# EAGLE board EuroKastle_PCB_BOARD (EAGLE 9.0.0)
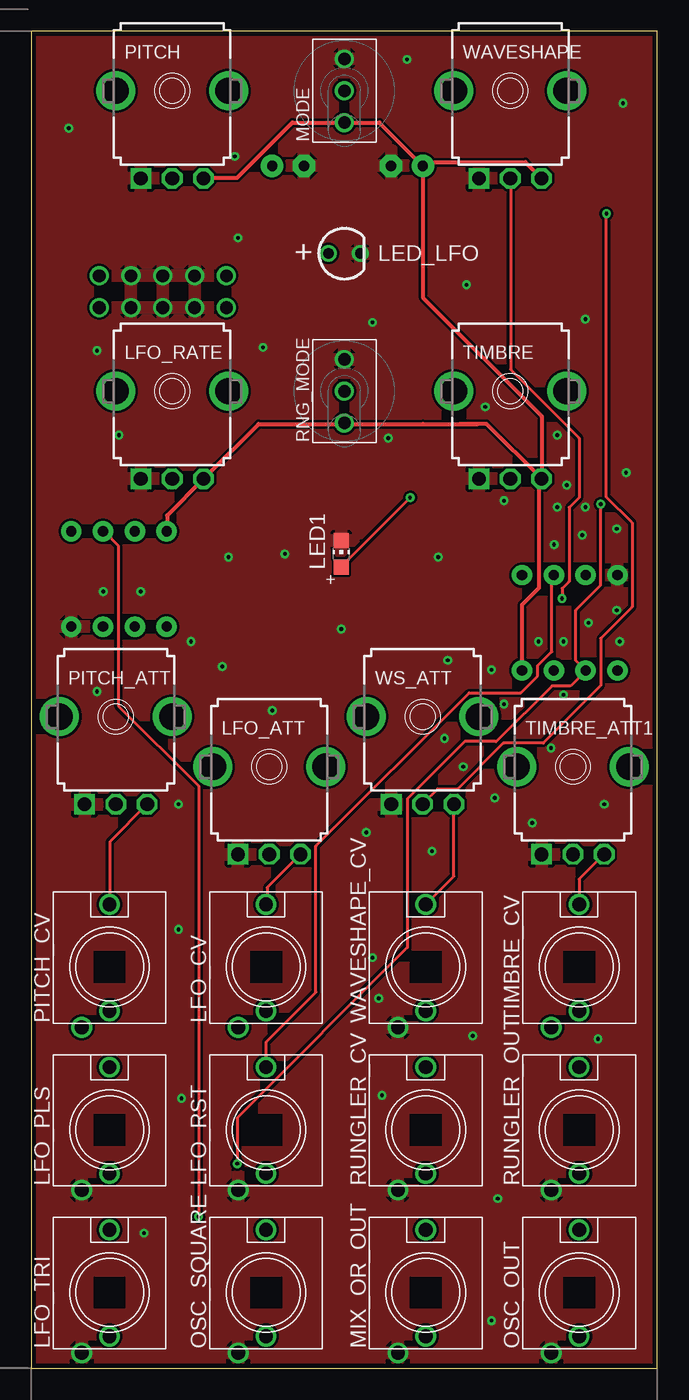
[diagram p0: board, top side]
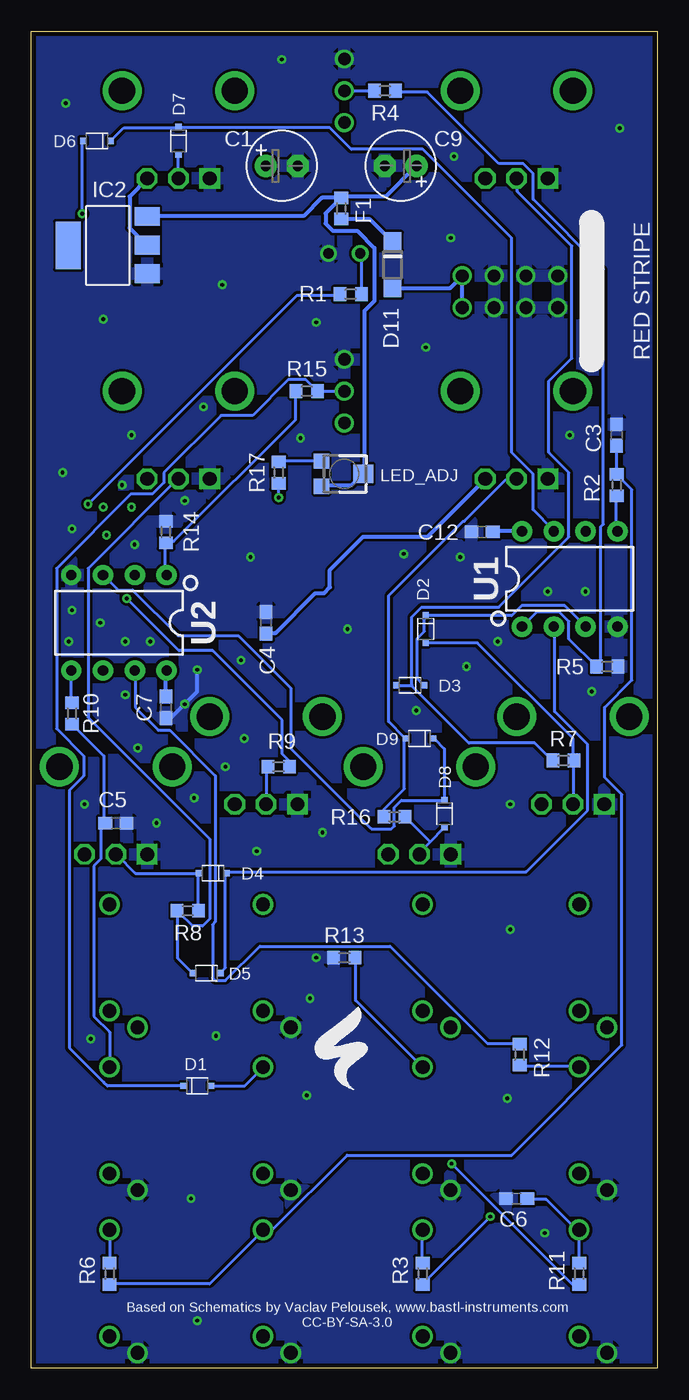
[diagram p1: board, bottom side, seen from below]

Size 50 x 106.8 mm. Coordinates in mm from the lower left corner, seen from the top.
Outline: 0,0 50,0 50,106.8 0,106.8 0,0
Copper layers (1*16): Top 0.035mm / dielectric 1.5mm / Bottom 0.035mm
Design rules "default *": minimum track width 6mil, minimum drill 0.3mm, track to track 8mil, track to pad 8mil, pad to pad 8mil, via to via 8mil, smd to smd 6mil, copper to edge 15mil, drill to drill 6mil, minimum pad ring 10mil, minimum via ring 8mil, stop-mask expansion 4mil, vias tented up to drill 15mil, thermal gap 10mil
Net classes: 0 default: width 0.254 mm; 1 +12V: width 0.33 mm; 2 +5V: width 0.33 mm; 3 GND: width 0.33 mm

## Footprints (pad centres in the part's own frame; a part is rotated, then mirrored left to right if it is on the bottom)
E2,5-6 = drill 0.813 pad 1.778: + -1.27,0 | drill 0.813 pad 1.778 octagon: - 1.27,0
C0603 = smd 1.1 x 1: 1 -0.85,0; 2 0.85,0
SOD323(F) = smd 0.5 x 0.5: 1 1.1,0; 2 -1.1,0
SOD123 = smd 1.4 x 1.4: A 1.9,0; C -1.9,0
R0603 = smd 1 x 1.1: 1 -0.85,0; 2 0.85,0
SOT223 = smd 1.499 x 2.007: 1 -2.261,-3.15; 2 0.025,-3.15; 3 2.311,-3.15 | smd 3.81 x 2.007: 4 0,3.15
CHIP-LED0805 = smd 1.2 x 1.2: A 0,-1.05; C 0,1.05
TC33X = smd 1.2 x 1.2: 1 -1,-1.825; 3 1,-1.825 | smd 1.5 x 1.6: 2 0,1.5
LED3MM = drill 0.813: A -1.27,0; K 1.27,0
9MM_SNAP-IN_POT = drill 1.1 square: 1 -2.5,-7 | drill 1.1 octagon: 2 0,-7; 3 2.5,-7 | drill 2.1 pad 2.794: CHASSIS1 -4.5,0; CHASSIS2 4.5,0
INSTRUO_S_JACK_SMALL2 = drill 1.1: GND -2.223,-4.826; NORM 0,-3.5; TIP 0,5
SUBMINI_TOGGLE = drill 1 pad 1.422: 1 -2.54,0; 3 2.54,0; COM 0,0
EURO_POWER2 = drill 1.016: GND1 -1.27,2.54; GND2 1.27,2.54; GND3 -1.27,0; GND4 1.27,0; GND5 -1.27,-2.54; GND6 1.27,-2.54; V+ -1.27,5.08; V++ 1.27,5.08; V- -1.27,-5.08; V-- 1.27,-5.08
DIP08_MCU = drill 0.813 pad 1.626: 1 -3.81,-3.81; 2 -1.27,-3.81; 3 1.27,-3.81; 4 3.81,-3.81; 5 3.81,3.81; 6 1.27,3.81; 7 -1.27,3.81; 8 -3.81,3.81

## Placement (x,y rotation side)
C1  22u  [E2,5-6]  30,96.05 0 bottom
C3  470n  [C0603]  3.25,74.55 270 bottom
C4  470n  [C0603]  31.25,59.55 90 bottom
C5  470n  [C0603]  43.25,43.55 180 bottom
C6  470n  [C0603]  11.25,13.55 180 bottom
C7  100n  [C0603]  39.25,52.8 270 bottom
C9  22u  [E2,5-6]  20.5,96.05 180 bottom
C12  100n  [C0603]  14,66.8 180 bottom
D1  610-CMDZ5L1  [SOD323(F)]  36.75,22.55 180 bottom
D2  610-CMDZ5L1  [SOD323(F)]  18.5,59.05 90 bottom
D3  610-CMDZ5L1  [SOD323(F)]  19.75,54.55 0 bottom
D4  610-CMDZ5L1  [SOD323(F)]  35.5,39.55 0 bottom
D5  610-CMDZ5L1  [SOD323(F)]  36,31.55 0 bottom
D6  610-CMDZ5L1  [SOD323(F)]  44.75,98.05 0 bottom
D7  610-CMDZ5L1  [SOD323(F)]  38.25,98.05 90 bottom
D8  610-CMDZ5L1  [SOD323(F)]  17,44.3 90 bottom
D9  610-CMDZ5L1  [SOD323(F)]  19,50.3 0 bottom
D11  1N5819HW  [SOD123]  21.15,88.15 270 bottom
F1  100Ohms  [R0603]  25.25,92.65 270 bottom
IC2  LM1117-5.0  [SOT223]  43.9,89.7 90 bottom
LED1  0805 LED  [CHIP-LED0805]  24.75,65.05 0 top
LED_ADJ  10k  [TC33X]  25,71.45 270 bottom
LED_LFO  LED3MM  [LED3MM]  25,89.05 0 top
LFO_ATT  100k(Plastic)  [9MM_SNAP-IN_POT]  19,48.05 0 top
LFO_CV  INSTRUO_S_JACK_SMALL2  [INSTRUO_S_JACK_SMALL2]  18.75,32.05 0 top
LFO_PLS  INSTRUO_S_JACK_SMALL2  [INSTRUO_S_JACK_SMALL2]  6.25,19.05 0 top
LFO_RATE  100k  [9MM_SNAP-IN_POT]  11.25,78.05 0 top
LFO_RST  INSTRUO_S_JACK_SMALL2  [INSTRUO_S_JACK_SMALL2]  18.75,19.05 0 top
LFO_TRI  INSTRUO_S_JACK_SMALL2  [INSTRUO_S_JACK_SMALL2]  6.25,6.05 0 top
MIX_OR_OUT  INSTRUO_S_JACK_SMALL2  [INSTRUO_S_JACK_SMALL2]  31.5,6.05 0 top
MODE  SPDT_ON_OFF_ON_SUBMINI  [SUBMINI_TOGGLE]  25,102.05 90 top
OSC_OUT  INSTRUO_S_JACK_SMALL2  [INSTRUO_S_JACK_SMALL2]  43.75,6.05 0 top
OSC_SQUARE  INSTRUO_S_JACK_SMALL2  [INSTRUO_S_JACK_SMALL2]  18.75,6.05 0 top
PITCH  100k  [9MM_SNAP-IN_POT]  11.25,102.05 0 top
PITCH_ATT  100k(Plastic)  [9MM_SNAP-IN_POT]  6.75,52.05 0 top
PITCH_CV  INSTRUO_S_JACK_SMALL2  [INSTRUO_S_JACK_SMALL2]  6.25,32.05 0 top
POWER  EURO_POWER2  [EURO_POWER2]  10.5,86 90 bottom
R1  1k  [R0603]  24.5,85.8 0 bottom
R2  1k  [R0603]  3.25,70.55 90 bottom
R3  1k  [R0603]  18.75,7.55 90 bottom
R4  100k  [R0603]  21.75,102.05 180 bottom
R5  100k  [R0603]  4,56.05 180 bottom
R6  1k  [R0603]  43.75,7.55 90 bottom
R7  100k  [R0603]  7.5,48.55 180 bottom
R8  100k  [R0603]  37.5,36.55 180 bottom
R9  100k  [R0603]  30.25,48.05 0 bottom
R10  1k  [R0603]  46.75,52.3 270 bottom
R11  1k  [R0603]  6.25,7.55 90 bottom
R12  1k  [R0603]  11,25.05 270 bottom
R13  100k  [R0603]  25,32.8 0 bottom
R14  100k  [R0603]  39.25,66.8 270 bottom
R15  100k  [R0603]  28,78.05 0 bottom
R16  100k  [R0603]  21,44.05 180 bottom
R17  470R  [R0603]  30.25,71.55 270 bottom
RNG_MODE  SPDT_ON_OFF_ON_SUBMINI  [SUBMINI_TOGGLE]  25,78.05 90 top
RUNGLER_CV  INSTRUO_S_JACK_SMALL2  [INSTRUO_S_JACK_SMALL2]  31.5,19.05 0 top
RUNGLER_OUT  INSTRUO_S_JACK_SMALL2  [INSTRUO_S_JACK_SMALL2]  43.75,19.05 0 top
TIMBRE  100k  [9MM_SNAP-IN_POT]  38.25,78.05 0 top
TIMBRE_ATT1  100k(Plastic)  [9MM_SNAP-IN_POT]  43.25,48.05 0 top
TIMBRE_CV  INSTRUO_S_JACK_SMALL2  [INSTRUO_S_JACK_SMALL2]  43.75,32.05 0 top
U1  ATTINY_85_VCO  [DIP08_MCU]  7,63.05 0 bottom
U2  ATTINY_85_LFO  [DIP08_MCU]  43,59.55 180 bottom
WAVESHAPE  100k  [9MM_SNAP-IN_POT]  38.25,102.05 0 top
WAVESHAPE_CV  INSTRUO_S_JACK_SMALL2  [INSTRUO_S_JACK_SMALL2]  31.5,32.05 0 top
WS_ATT  100k(Plastic)  [9MM_SNAP-IN_POT]  31.25,52.05 0 top

## Library data of the parts
C1 C3-C6 C9 F1 LFO_ATT LFO_CV LFO_PLS LFO_RATE LFO_RST LFO_TRI MIX_OR_OUT MODE OSC_OUT OSC_SQUARE PITCH PITCH_ATT PITCH_CV R1-R16 RNG_MODE RUNGLER_CV RUNGLER_OUT TIMBRE TIMBRE_ATT1 TIMBRE_CV WAVESHAPE WAVESHAPE_CV WS_ATT = AA_Stobbert
C7 C12 = rcl
D1-D9 = nxp_60_1_1
D11 = diode
IC2 = og-vreg
LED1 LED_ADJ R17 = adafruit
LED_LFO = zlob
POWER = INSTRUO
U1 U2 = SparkFun-Retired; PROD_ID: IC-09439

## Nets
+5V [+5V]: C1.+ C4.1 C7.1 C12.1 IC2.2 LFO_RATE.3 MODE.1 PITCH.3 RNG_MODE.1 TIMBRE.3 U1.8 U2.8 WAVESHAPE.3
GND [GND]: C1.- C3.1 C4.2 C5.1 C6.2 C7.2 C9.- C12.2 IC2.1 LED1.C LED_LFO.K LFO_ATT.1 LFO_PLS.GND LFO_RATE.1 LFO_RST.GND LFO_TRI.GND MIX_OR_OUT.GND MODE.3 OSC_OUT.GND OSC_SQUARE.GND PITCH.1 PITCH_ATT.1 POWER.GND1 POWER.GND2 POWER.GND3 POWER.GND4 POWER.GND5 POWER.GND6 R5.1 R13.1 R14.1 RNG_MODE.3 RUNGLER_CV.GND RUNGLER_OUT.GND TIMBRE.1 TIMBRE_ATT1.1 U1.4 U2.4 WAVESHAPE.1 WAVESHAPE_CV.GND WS_ATT.1
LFO_MIX: D8.1 D9.1 U2.3
MISO: R3.1 U1.6
MOSI: R2.1 U1.5
N$1: C3.2 MIX_OR_OUT.TIP R2.2 R6.1
N$2: R4.1 R5.2 U1.1
N$3: OSC_SQUARE.TIP R3.2
N$4: MODE.COM R4.2
N$5: OSC_OUT.TIP R6.2
N$6: PITCH_ATT.3 PITCH_CV.TIP
N$7: D2.2 PITCH_ATT.2 R7.1
N$8: TIMBRE_ATT1.3 TIMBRE_CV.TIP
N$9: D3.2 PITCH.2 R7.2
N$10: D4.2 R8.1 TIMBRE_ATT1.2
N$11: D5.2 R8.2 TIMBRE.2
N$12: D6.2 R9.1 WS_ATT.2
N$13: WAVESHAPE_CV.TIP WS_ATT.3
N$14: D7.2 R9.2 WAVESHAPE.2
N$15: R10.1 U2.5
N$16: C5.2 R10.2 RUNGLER_OUT.TIP
N$17: R1.1 R11.1 U2.6
N$18: C6.1 LFO_TRI.TIP R11.2
N$19: LFO_RST.TIP R13.2 U2.2
N$20: R12.1 U2.7
N$21: LFO_PLS.TIP R12.2
N$22: R14.2 R15.1 U2.1
N$23: LFO_ATT.3 LFO_CV.TIP
N$24: D1.2 RUNGLER_CV.TIP
N$25: D8.2 LFO_ATT.2 R16.1
N$26: D9.2 LFO_RATE.2 R16.2
N$27: D1.1 R15.2 RNG_MODE.COM
N$28: LED_LFO.A R1.2
N$29: LED1.A R17.2
N$30: LED_ADJ.1 R17.1
N$34 [+12V]: D11.C F1.2
PITCH: D2.1 D3.1 U1.3
PWR+ [+12V]: D11.A POWER.V+ POWER.V++
TMBR: D4.1 D5.1 U1.2
VCC [+12V]: C9.+ F1.1 IC2.3 LED_ADJ.2 LED_ADJ.3
WS: D6.1 D7.1 U1.7

## Tracks (layer width: path | path; a pad name or v marks a point on that pad's centre or on a via)
+5V
  Top 0.33: C1.+ 31.18,96.12 27.79,99.51 MODE.1 20.86,99.51 16.44,95.09 13.81,95.09 PITCH.3 | C1.+ 31.41,96.12 31.64,96.35 39.45,96.35 WAVESHAPE.3 | U1.8 10.84,66.97 10.84,68.12 13.7,70.97 LFO_RATE.3 13.81,71.09 18.15,75.43 24.9,75.43 RNG_MODE.1 25.12,75.43 31.3,75.43 34.25,75.43 | 34.25,75.43 35.64,75.43 | TIMBRE.3 40.55,71.09 40.75,71.28 40.75,76.05 31.27,85.53 C1.+ | 31.3,95.89 C1.+ | TIMBRE.3 36.37,75.43 34.25,75.43 | U2.8 39.19,60.99 40.55,62.35 40.55,70.85 TIMBRE.3
  Bottom 0.33: WAVESHAPE.3 40.78,94.98 42.16,93.61 42.16,91.09 40.79,89.72 IC2.2 | C7.1 39.3,53.72 39.3,55.66 U2.8 | C12.1 13.12,66.86 10.84,66.86 U1.8 | C4.1 31.18,58.74 30.5,58.74 27.32,61.92 26.62,61.92 26.15,62.39 26.15,63.77 23.52,66.4 18.38,66.4 13.81,70.97 LFO_RATE.3
GND  (via drill 0.3)
  Bottom 0.33: 36.75,54.45 36.75,54.8 | 36.75,54.8 v36.75,55.8 | C7.2 38.85,51.95 v37.75,53.05 36.75,54.05 36.75,54.8
  other vias: 15.25,56.05 12.75,58.05 8.75,62.05 5.75,62.05 5.25,54.05 19.25,52.55 46.75,60.55 42.5,58.05 46.75,67.05 44.25,68.8 44,66.55 42,68.8 41.75,65.8 37.75,69.3 44.25,83.8 34.75,86.55 27.25,83.55 18.5,81.55 28.5,74.3 36.25,76.8 42,74.55 7,74.55 20.25,65.05 16.25,96.8 42.75,70.55 26.75,42.8 27.75,29.55 11.75,35.05 12,21.55 28,21.8 35.25,26.55 45.25,26.3 37,45.55 27.25,32.8 9,10.8 33,50.3 34.5,48.05 40.5,58.05 47,58.05 44.5,59.55 41.5,49.55 42.5,53.8 15.75,64.8 11.75,45.05 33.25,56.55 24.75,59.05 32.5,64.8 5.25,81.3 16.5,90.3 3,99.05 30,104.55 47.25,101.05 47.5,71.55 36.75,3.8 37.25,13.55 32,41.3 40,43.55 45.75,45.05
  pour Top: -0.75,108.05 -0.75,-0.95 51.25,-0.95 51.25,108.05
  pour Bottom: -1.75,109.05 -1.75,-1.95 52.25,-1.95 52.25,109.05
LFO_MIX
  Bottom 0.254: D9.1 17.81,50.29 17.01,49.49 17.01,45.48 D8.1 17.12,45.37 20.44,45.37 21.01,44.8 21.01,43.31 21.24,43.08 22.84,43.08 29.28,49.52 29.28,54.33 33.47,58.52 38.28,58.52 41.93,62.17 43.07,62.17 44.21,63.32 U2.3
MISO  (via drill 0.3)
  Top 0.254: v13.35,12.11 13.35,46.51 6.95,52.92 6.95,65.72 5.81,66.86 U1.6
  Bottom 0.254: v13.35,12.11 18.72,6.74 R3.1
MOSI
  Bottom 0.254: R2.1 3.29,69.6 3.29,66.97 U1.5
N$1
  Bottom 0.254: C3.2 3.29,73.6 3.29,71.43 R2.2 3.18,71.32 2.04,70.17 2.04,54.97 4.21,52.8 4.21,47.2 2.84,45.83 2.84,25.83 11.64,17.03 24.78,17.03 30.73,11.08 31.41,11.08 MIX_OR_OUT.TIP 31.52,10.97 35.76,6.74 43.64,6.74 R6.1
N$2
  Bottom 0.254: 4.89,56.11 R5.2 | U1.1 10.72,59.32 9.58,60.46 7.87,60.46 7.07,59.66 7.07,58.27 R5.2 | R4.1 20.89,101.95 18.38,101.95 12.67,96.23 10.72,96.23 9.92,95.44 9.92,93.38 4.32,87.78 4.32,67.43 4.55,67.2 4.55,56.35 R5.2
N$3
  Bottom 0.254: R3.2 18.84,8.45 18.84,10.97 OSC_SQUARE.TIP
N$4
  Bottom 0.254: R4.2 22.61,102.06 24.9,102.06 MODE.COM
N$5
  Bottom 0.254: R6.2 43.76,8.45 43.76,10.97 OSC_OUT.TIP
N$6
  Top 0.254: PITCH_CV.TIP 6.26,37.14 6.26,42.06 9.24,45.03 PITCH_ATT.3
N$7
  Bottom 0.254: D2.2 14.38,57.94 6.72,50.29 6.72,48.57 R7.1 6.72,48.46 6.72,45.14 PITCH_ATT.2
N$8
  Top 0.254: TIMBRE_CV.TIP 43.76,37.14 43.76,39.08 45.7,41.03 TIMBRE_ATT1.3
N$9
  Bottom 0.254: 19.64,54.52 20.78,54.52 D3.2 | 19.64,54.52 15.07,49.94 9.81,49.94 8.44,48.57 R7.2 | PITCH.2 11.18,94.98 11.18,93.99 6.84,89.64 6.84,80.69 8.66,78.86 8.66,73.15 7.07,71.55 7.07,66.4 12.67,60.8 18.84,60.8 19.64,60 19.64,54.63 19.64,54.52
N$10
  Bottom 0.254: R8.1 36.67,36.57 36.67,39.54 D4.2 36.78,39.54 41.7,39.54 43.18,41.03 TIMBRE_ATT1.2
N$11
  Bottom 0.254: 37.13,31.65 D5.2 38.29,32.74 38.29,36.48 | 38.29,36.48 38.27,36.46 37.13,35.31 36.33,35.31 35.76,35.88 35.76,42.28 45.47,52 45.47,63.89 38.27,71.09 TIMBRE.2 | 38.29,36.48 R8.2
N$12  (via drill 0.3)
  Top 0.254: v45.93,92.23 45.93,69.6 47.98,67.55 47.98,60.82 45.47,58.3 45.47,54.52 40.89,49.94 37.7,49.94 34.04,46.29 32.44,46.29 31.3,45.14 WS_ATT.2
  Bottom 0.254: v45.93,92.23 45.93,97.95 D6.2 | R9.1 31.18,48 31.18,45.14 WS_ATT.2
N$13
  Top 0.254: WAVESHAPE_CV.TIP 33.75,39.3 WS_ATT.3
N$14  (via drill 0.3)
  Top 0.254: v42.38,61.49 42.38,62.29 42.95,62.86 42.95,68.75 43.75,69.55 43.75,74.3 38.27,79.77 38.27,94.98 WAVESHAPE.2
  Bottom 0.254: D7.2 38.27,96.92 38.27,95.09 WAVESHAPE.2 | v42.38,61.49 38.22,57.33 35.53,57.33 29.97,51.77 29.97,49.08 29.47,48.57 29.47,48.11 R9.2
N$15
  Bottom 0.254: R10.1 46.84,53.26 46.84,55.66 U2.5
N$16
  Bottom 0.254: R10.2 46.73,51.43 44.21,48.91 44.21,43.66 C5.2 44.1,43.43 44.44,43.08 44.44,40.69 45.01,40.11 45.01,28.11 43.76,26.86 43.76,24.11 RUNGLER_OUT.TIP
N$17  (via drill 0.3)
  Top 0.254: v16.44,16.34 16.44,20 30.04,33.6 30.04,45.48 34.61,50.06 37.13,50.06 41.58,54.52 43.07,54.52 44.21,55.66 U2.6 43.48,56.53 43.48,60.56 45.47,62.55 v45.47,69.03
  Bottom 0.254: v16.44,16.34 6.84,6.74 6.26,6.74 R11.1 | v45.47,69.03 28.78,85.72 25.35,85.72 R1.1
N$18
  Bottom 0.254: R11.2 6.26,8.45 6.26,10.97 LFO_TRI.TIP 6.38,10.97 8.89,13.48 10.38,13.48 C6.1
N$19
  Top 0.254: U2.2 41.7,63.32 41.56,63.18 41.56,57.24 40.44,56.11 40.44,55.31 39.07,53.94 34.95,53.94 22.72,41.71 22.72,30.02 18.75,26.05 LFO_RST.TIP
  Bottom 0.254: R13.2 24.1,32.8 24.1,29.37 18.84,24.11 LFO_RST.TIP
N$20
  Bottom 0.254: R12.1 11.07,25.94 13.58,25.94 21.35,33.71 31.75,33.71 34.5,30.97 35.3,30.97 35.53,31.2 35.53,35.43 35.3,35.66 35.3,47.31 38.95,50.97 39.87,50.97 41.7,52.8 41.7,55.66 U2.7
N$21
  Bottom 0.254: R12.2 10.95,24.11 6.26,24.11 LFO_PLS.TIP
N$22
  Bottom 0.254: U2.1 39.3,63.43 39.3,65.94 R14.2 39.18,66.06 38.61,66.06 28.9,75.77 28.9,77.95 R15.1
N$23
  Top 0.254: LFO_CV.TIP 18.84,37.14 18.84,38.4 21.47,41.03 LFO_ATT.3
N$24
  Bottom 0.254: RUNGLER_CV.TIP 31.52,24 32.97,22.55 D1.2
N$25
  Bottom 0.254: 18.15,42.06 19.07,41.14 LFO_ATT.2 | 18.15,42.06 D8.2 | 18.15,42.06 20.09,44 R16.1
N$26
  Bottom 0.254: R16.2 21.81,44.11 21.81,44.69 20.21,46.29 20.21,50.29 D9.2 20.21,50.4 21.47,51.66 21.47,61.72 15.52,67.66 15.41,67.66 12.09,70.97 11.29,70.97 LFO_RATE.2
N$27
  Bottom 0.254: RNG_MODE.COM 27.07,78.06 R15.2 27.18,78.06 28.1,78.97 29.47,78.97 32.33,76.12 34.84,76.12 39.41,71.55 39.41,70.75 40.33,69.83 42.04,69.83 47.98,63.89 47.98,51.09 45.81,48.91 45.81,47.31 46.96,46.17 46.96,25.6 44.2,22.85 43.91,22.55 D1.1
N$28
  Bottom 0.254: R1.2 23.64,85.83 23.64,89.03 LED_LFO.A
N$29  (via drill 0.3)
  Top 0.254: v30.25,69.55 24.75,64.05 LED1.A
  Bottom 0.254: v30.25,69.55 30.25,70.55 R17.2
N$30
  Bottom 0.254: R17.1 30.15,72.46 26.84,72.46 LED_ADJ.1
N$34
  Bottom 0.33: F1.2 25.24,91.78 22.95,91.78 21.24,90.06 D11.C
PITCH
  Bottom 0.254: D3.1 18.72,54.63 19.18,55.09 19.18,58.29 18.61,58.86 18.61,60.12 D2.1 18.38,60.12 11.64,60.12 10.84,60.92 7.41,60.92 5.81,59.32 U1.3
PWR+
  Bottom 0.33: D11.A 21.12,86.29 16.55,86.29 15.64,87.2 | 15.64,87.2 POWER.V++ | 15.64,85.38 15.64,84.8 POWER.V+ 15.58,87.15 15.64,87.2
TMBR
  Bottom 0.254: D5.1 34.84,31.65 34.5,32 34.5,39.54 D4.1 34.38,39.66 10.49,39.66 5.58,44.57 5.58,49.83 8.21,52.46 8.21,59.2 U1.2
VCC
  Bottom 0.33: LED_ADJ.3 26.73,70.52 24.44,70.52 23.52,71.43 LED_ADJ.2 23.41,71.55 23.41,84.46 22.61,85.26 22.61,89.49 23.98,90.86 25.93,90.86 26.5,91.43 26.5,92.25 F1.1 | F1.1 25.24,93.61 21.7,93.61 19.3,96.01 C9.+ | 40.67,92.12 IC2.3 40.71,92.05 28.25,92.05 26.8,93.5 F1.1 | 25.35,93.38 F1.1
WS
  Bottom 0.254: D6.1 43.64,98.06 42.61,99.09 38.27,99.09 D7.1 38.16,99.09 26.15,99.09 24.44,97.38 18.72,97.38 11.64,90.29 11.64,73.15 9.92,71.43 9.92,68.57 8.32,66.97 U1.7

## Text on the board
tPlace: +
bPlace: RED STRIPE | Based on Schematics by Vaclav Pelousek, www.bastl-instruments.com / CC-BY-SA-3.0
bStop: EURO KASTLE MAIN PCB